# EAGLE board Circuit 3 using 4060B (EAGLE 5.06)
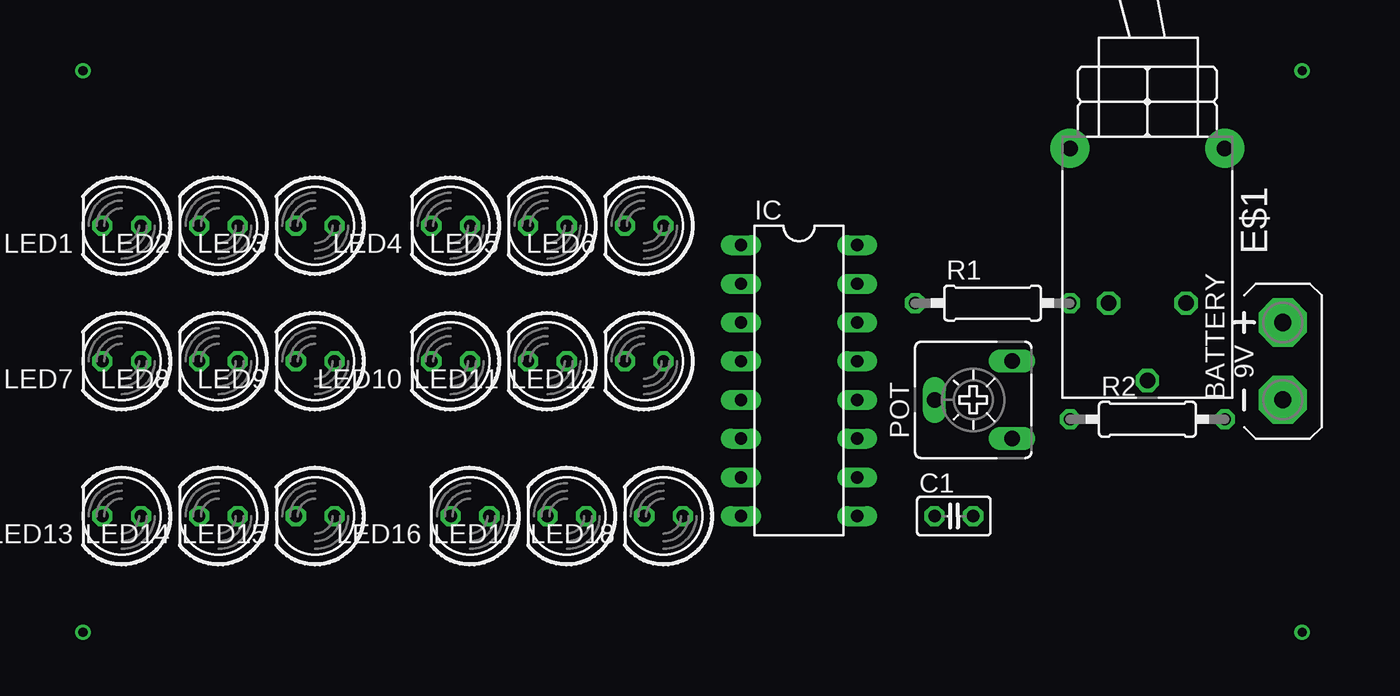
[diagram p0: board, top side]
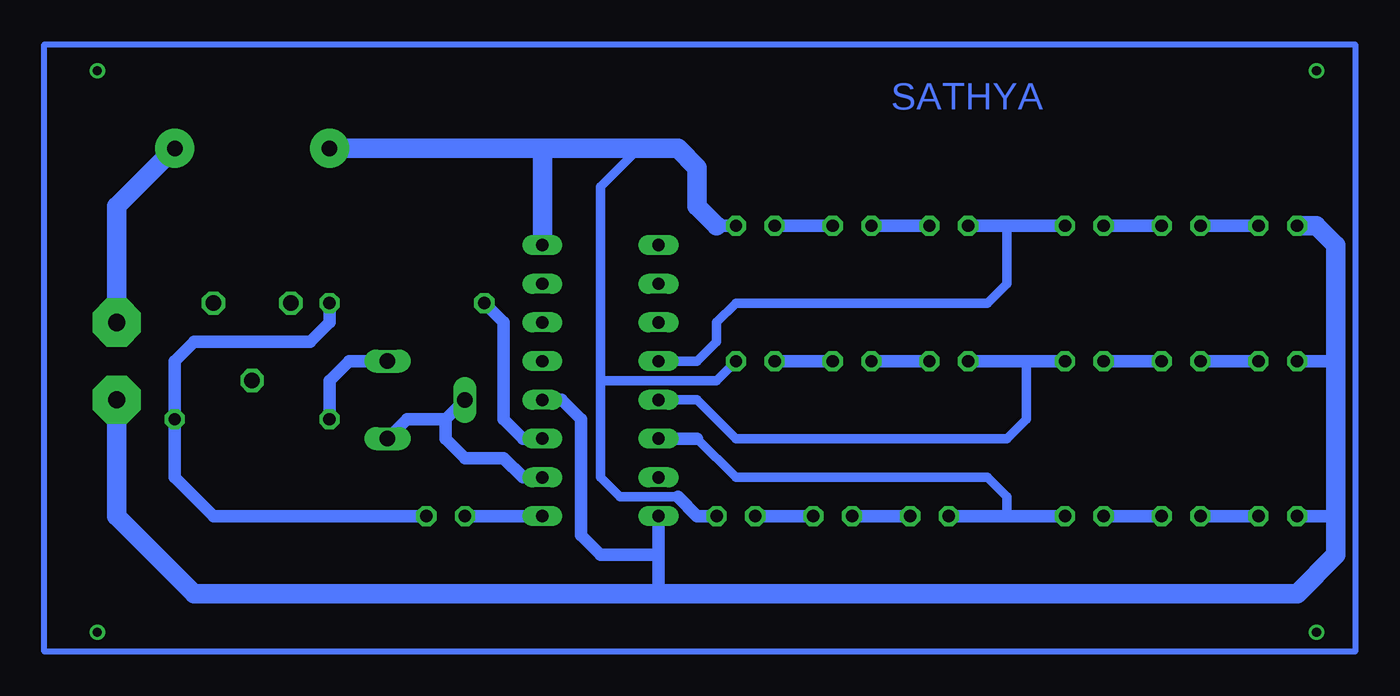
[diagram p1: board, bottom side, seen from below]

No outline drawn. Coordinates in mm, seen from the top.
Copper layers (1*16): Top 0.035mm / dielectric 1.5mm / Bottom 0.035mm
Design rules "default": minimum track width 10mil, minimum drill 24mil, track to track 8mil, track to pad 8mil, pad to pad 8mil, via to via 8mil, smd to smd 8mil, copper to edge 40mil, drill to drill 8mil, minimum pad ring 10mil, minimum via ring 8mil, stop-mask expansion 4mil, vias tented up to drill 0mil, thermal gap 10mil

## Footprints (pad centres in the part's own frame; a part is rotated, then mirrored left to right if it is on the bottom)
AB9V = drill 1.118 pad 3.15 octagon: + 0,2.54; - 0,-2.54
C025-025X050 = drill 0.813 octagon: 1 -1.27,0; 2 1.27,0
316-917 = drill 1.016 octagon: 1 10.16,2.54; 2 15.24,0; 3 10.16,-2.54 | drill 1.016 pad 2.54 round: B 0,-5.08; B1 0,5.08
DIL16 = drill 0.813 long: 1 -8.89,-3.81; 2 -6.35,-3.81; 3 -3.81,-3.81; 4 -1.27,-3.81; 5 1.27,-3.81; 6 3.81,-3.81; 7 6.35,-3.81; 8 8.89,-3.81; 9 8.89,3.81; 10 6.35,3.81; 11 3.81,3.81; 12 1.27,3.81; 13 -1.27,3.81; 14 -3.81,3.81; 15 -6.35,3.81; 16 -8.89,3.81
LED5MM = drill 0.813 octagon: A -1.27,0; K 1.27,0
CA6V = drill 1.016 long: A -2.54,-2.54; E 2.54,-2.54; S 0,2.54
0207/10 = drill 0.813 octagon: 1 -5.08,0; 2 5.08,0

## Placement (x,y rotation side)
BATTERY  [AB9V]  81.28,27.94 0 top
C1  0.1uF  [C025-025X050]  59.69,17.78 0 top
E$1  [316-917]  72.39,41.91 270 top
IC  4060B  [DIL16]  49.53,26.67 270 top
LED1  [LED5MM]  5.08,36.83 180 top
LED2  [LED5MM]  11.43,36.83 180 top
LED3  [LED5MM]  17.78,36.83 180 top
LED4  [LED5MM]  26.67,36.83 180 top
LED5  [LED5MM]  33.02,36.83 180 top
LED6  [LED5MM]  39.37,36.83 180 top
LED7  [LED5MM]  5.08,27.94 180 top
LED8  [LED5MM]  11.43,27.94 180 top
LED9  [LED5MM]  17.78,27.94 180 top
LED10  [LED5MM]  26.67,27.94 180 top
LED11  [LED5MM]  33.02,27.94 180 top
LED12  [LED5MM]  39.37,27.94 180 top
LED13  [LED5MM]  5.08,17.78 180 top
LED14  [LED5MM]  11.43,17.78 180 top
LED15  [LED5MM]  17.78,17.78 180 top
LED16  [LED5MM]  27.94,17.78 180 top
LED17  [LED5MM]  34.29,17.78 180 top
LED18  [LED5MM]  40.64,17.78 180 top
POT  47k  [CA6V]  60.96,25.4 90 top
R1  470K  [0207/10]  62.23,31.75 0 top
R2  10K  [0207/10]  72.39,24.13 0 top

## Library data of the parts
BATTERY = battery
C1 R1 R2 = rcl
E$1 = switch
IC = ic-package
LED1-LED18 = led
POT = pot

## Nets
S$2: LED5.A LED6.K
S$3: LED4.A LED5.K
S$4: IC.5 LED9.A LED10.K
S$5: LED2.A LED3.K
S$6: LED1.A LED2.K
S$7: LED7.A LED8.K
S$8: LED8.A LED9.K
S$10: LED10.A LED11.K
S$11: LED11.A LED12.K
S$12: LED17.A LED18.K
S$13: LED16.A LED17.K
S$15: LED14.A LED15.K
S$16: LED13.A LED14.K
S$17: IC.4 LED3.A LED4.K
S$18: IC.6 LED15.A LED16.K
S$19: BATTERY.- IC.8 IC.12 LED1.K LED7.K LED13.K
S$20: C1.1 IC.9
S$21: IC.10 POT.A POT.S
S$22: IC.11 R1.1
S$23: POT.E R2.1
S$25: BATTERY.+
S$26: E$1.B IC.16 LED6.A LED12.A LED18.A
S$29: C1.2 R1.2 R2.2

## Tracks (layer width: path | path; a pad name or v marks a point on that pad's centre or on a via)
S$1
  Bottom 0.406: 0,8.89 86.03,8.89 86.03,48.73 0,48.73 0,8.89
S$2
  Bottom 0.813: LED6.K LED5.A
S$3
  Bottom 0.813: LED5.K LED4.A
S$4
  Bottom 0.61: IC.5 43.18,25.4 40.64,22.86 22.86,22.86 21.59,24.13 21.59,27.94
  Bottom 0.813: LED10.K 21.59,27.94 LED9.A
S$5
  Bottom 0.813: LED3.K LED2.A
S$6
  Bottom 0.813: LED2.K LED1.A
S$7
  Bottom 0.813: LED8.K LED7.A
S$8
  Bottom 0.813: LED9.K LED8.A
S$9  (via drill 0.6)
  other vias: 2.54,46.99
S$10
  Bottom 0.813: LED11.K LED10.A
S$11
  Bottom 0.813: LED12.K LED11.A
S$12
  Bottom 0.813: LED18.K LED17.A
S$13
  Bottom 0.813: LED17.K LED16.A
S$14  (via drill 0.6)
  other vias: 2.54,10.16
S$15
  Bottom 0.813: LED15.K LED14.A
S$16
  Bottom 0.813: LED14.K LED13.A
S$17
  Bottom 0.61: 22.86,36.83 22.86,33.02 24.13,31.75 40.64,31.75 41.91,30.48 41.91,29.21 43.18,27.94 IC.4
  Bottom 0.813: LED4.K 22.86,36.83 LED3.A
S$18
  Bottom 0.61: 43.18,22.86 40.64,20.32 24.13,20.32 22.86,19.05 22.86,17.78
  Bottom 0.813: IC.6 43.18,22.86 | LED16.K 22.86,17.78 LED15.A
S$19
  Bottom 0.813: IC.12 52.07,25.4 50.8,24.13 50.8,16.51 49.53,15.24 45.72,15.24 | 1.27,27.94 LED7.K | LED13.K 1.27,17.78 1.27,16.51 | 45.72,12.7 45.72,15.24 | 45.72,15.24 IC.8
  Bottom 1.27: LED1.K 2.54,36.83 1.27,35.56 1.27,27.94 1.27,16.51 1.27,15.24 3.81,12.7 45.72,12.7 76.2,12.7 81.28,17.78 BATTERY.-
S$20
  Bottom 0.813: IC.9 C1.1
S$21
  Bottom 0.813: IC.10 54.61,20.32 55.88,21.59 58.42,21.59 59.69,22.86 59.69,24.13 | 59.69,24.13 POT.S | 59.69,24.13 62.23,24.13 POT.A
S$22
  Bottom 0.813: IC.11 54.61,22.86 55.88,24.13 55.88,30.48 R1.1
S$23
  Bottom 0.813: POT.E 66.04,27.94 67.31,26.67 R2.1
S$25
  Bottom 1.27: 77.47,41.91 81.28,38.1 BATTERY.+
S$26
  Bottom 0.61: LED12.A 41.91,26.67 49.53,26.67 | 46.99,41.91 49.53,39.37 49.53,26.67 | 49.53,26.67 49.53,20.32 48.26,19.05 44.45,19.05
  Bottom 0.813: 41.91,36.83 LED6.A | 44.45,19.05 43.18,17.78 LED18.A
  Bottom 1.27: 41.91,36.83 43.18,38.1 43.18,40.64 44.45,41.91 46.99,41.91 53.34,41.91 | 53.34,41.91 IC.16 | 53.34,41.91 E$1.B
S$27  (via drill 0.6)
  other vias: 82.55,46.99
S$28  (via drill 0.6)
  other vias: 82.55,10.16
S$29
  Bottom 0.813: R1.2 67.31,30.48 68.58,29.21 76.2,29.21 77.47,27.94 R2.2 77.47,20.32 74.93,17.78 C1.2

## Text on the board
Bottom: SATHYA